# Altium PCB Clock Segment.PcbDoc
Units mm, origin at the board's own origin, x right, y up, seen from the top; angles counter-clockwise.
Board outline 100.88 x 86.34 mm, 2 copper layers (Top Layer, Bottom Layer), stack 1.58 mm thick; 43 components, 53 nets, 142 pads, 0 vias.
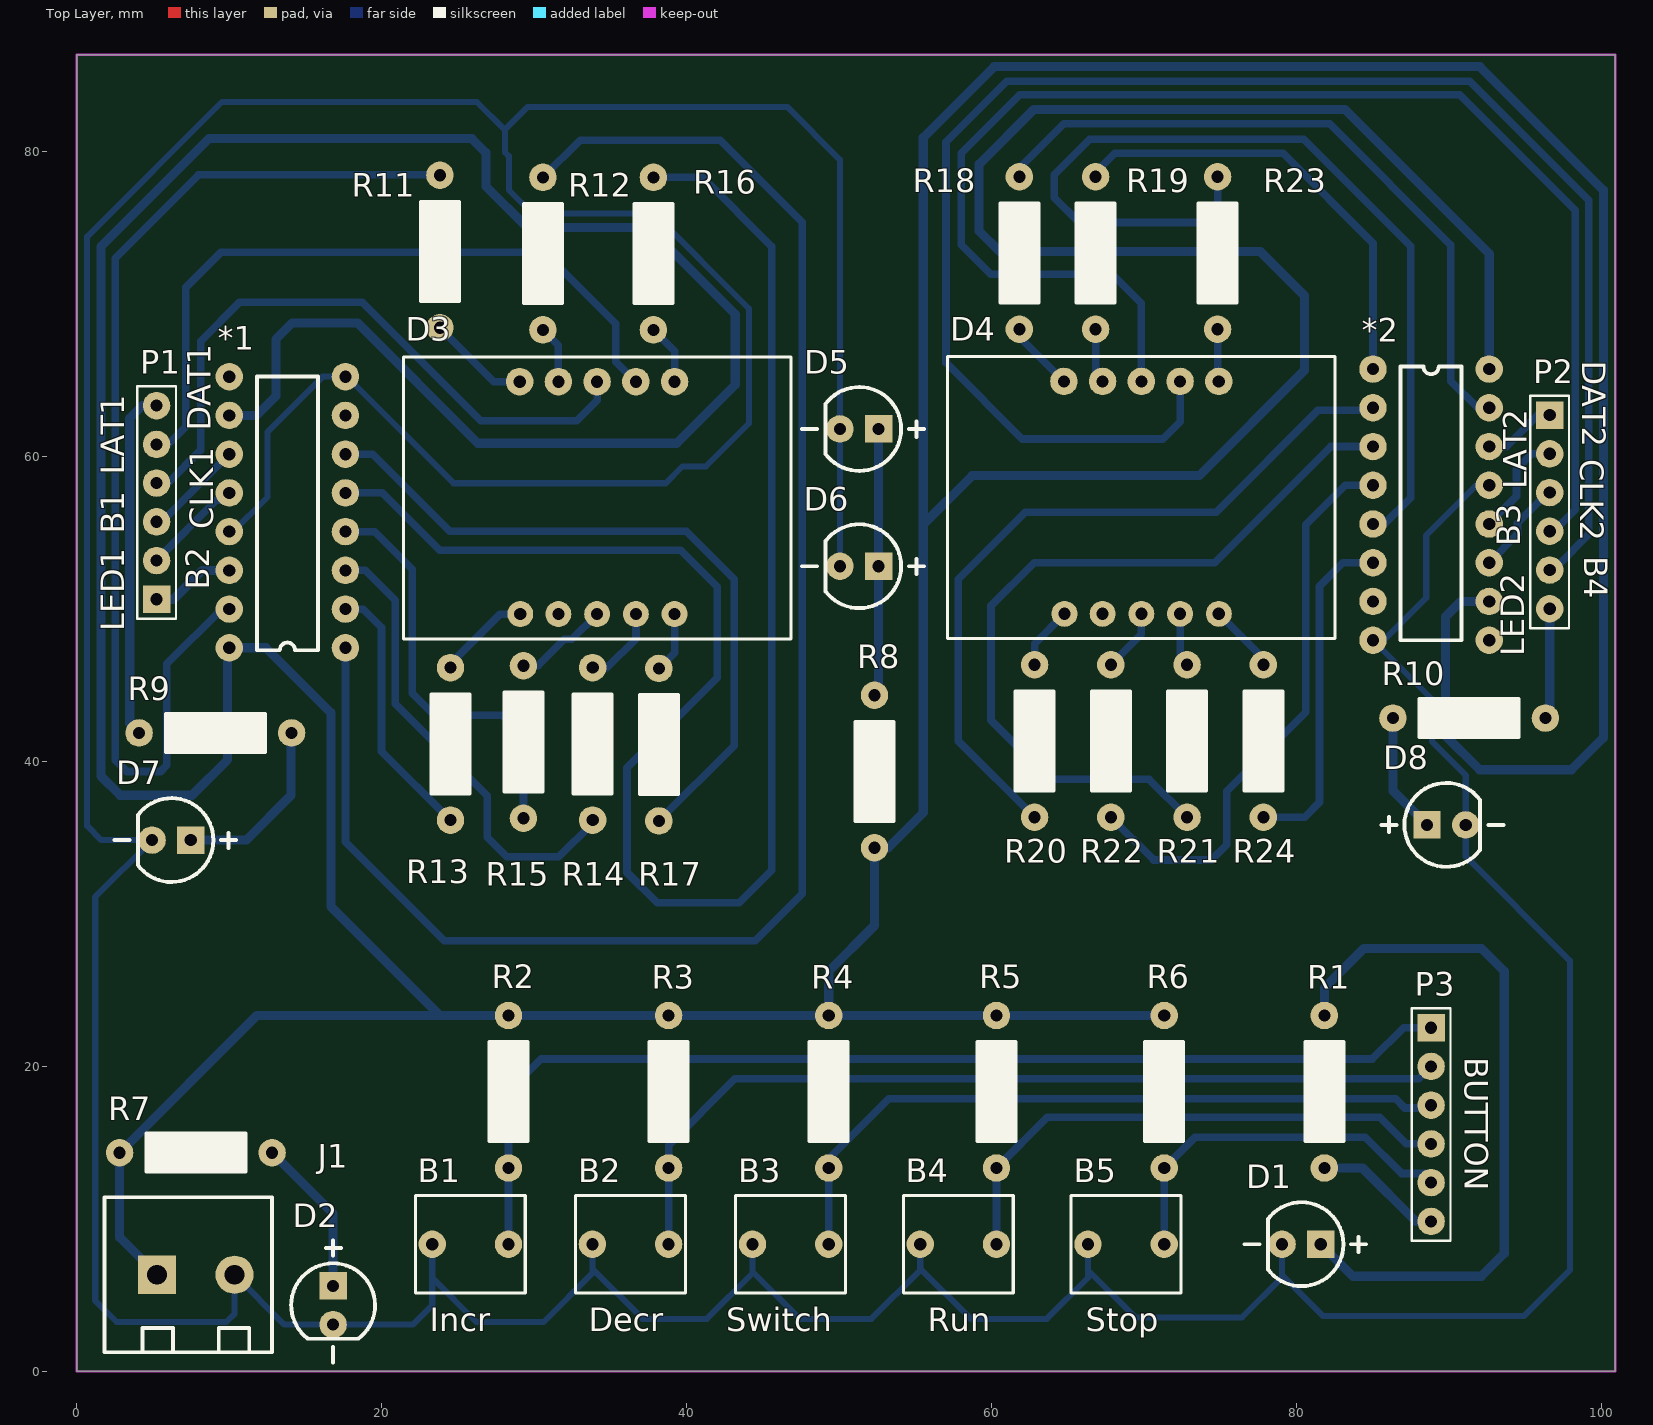
[diagram p0: Top Layer view]
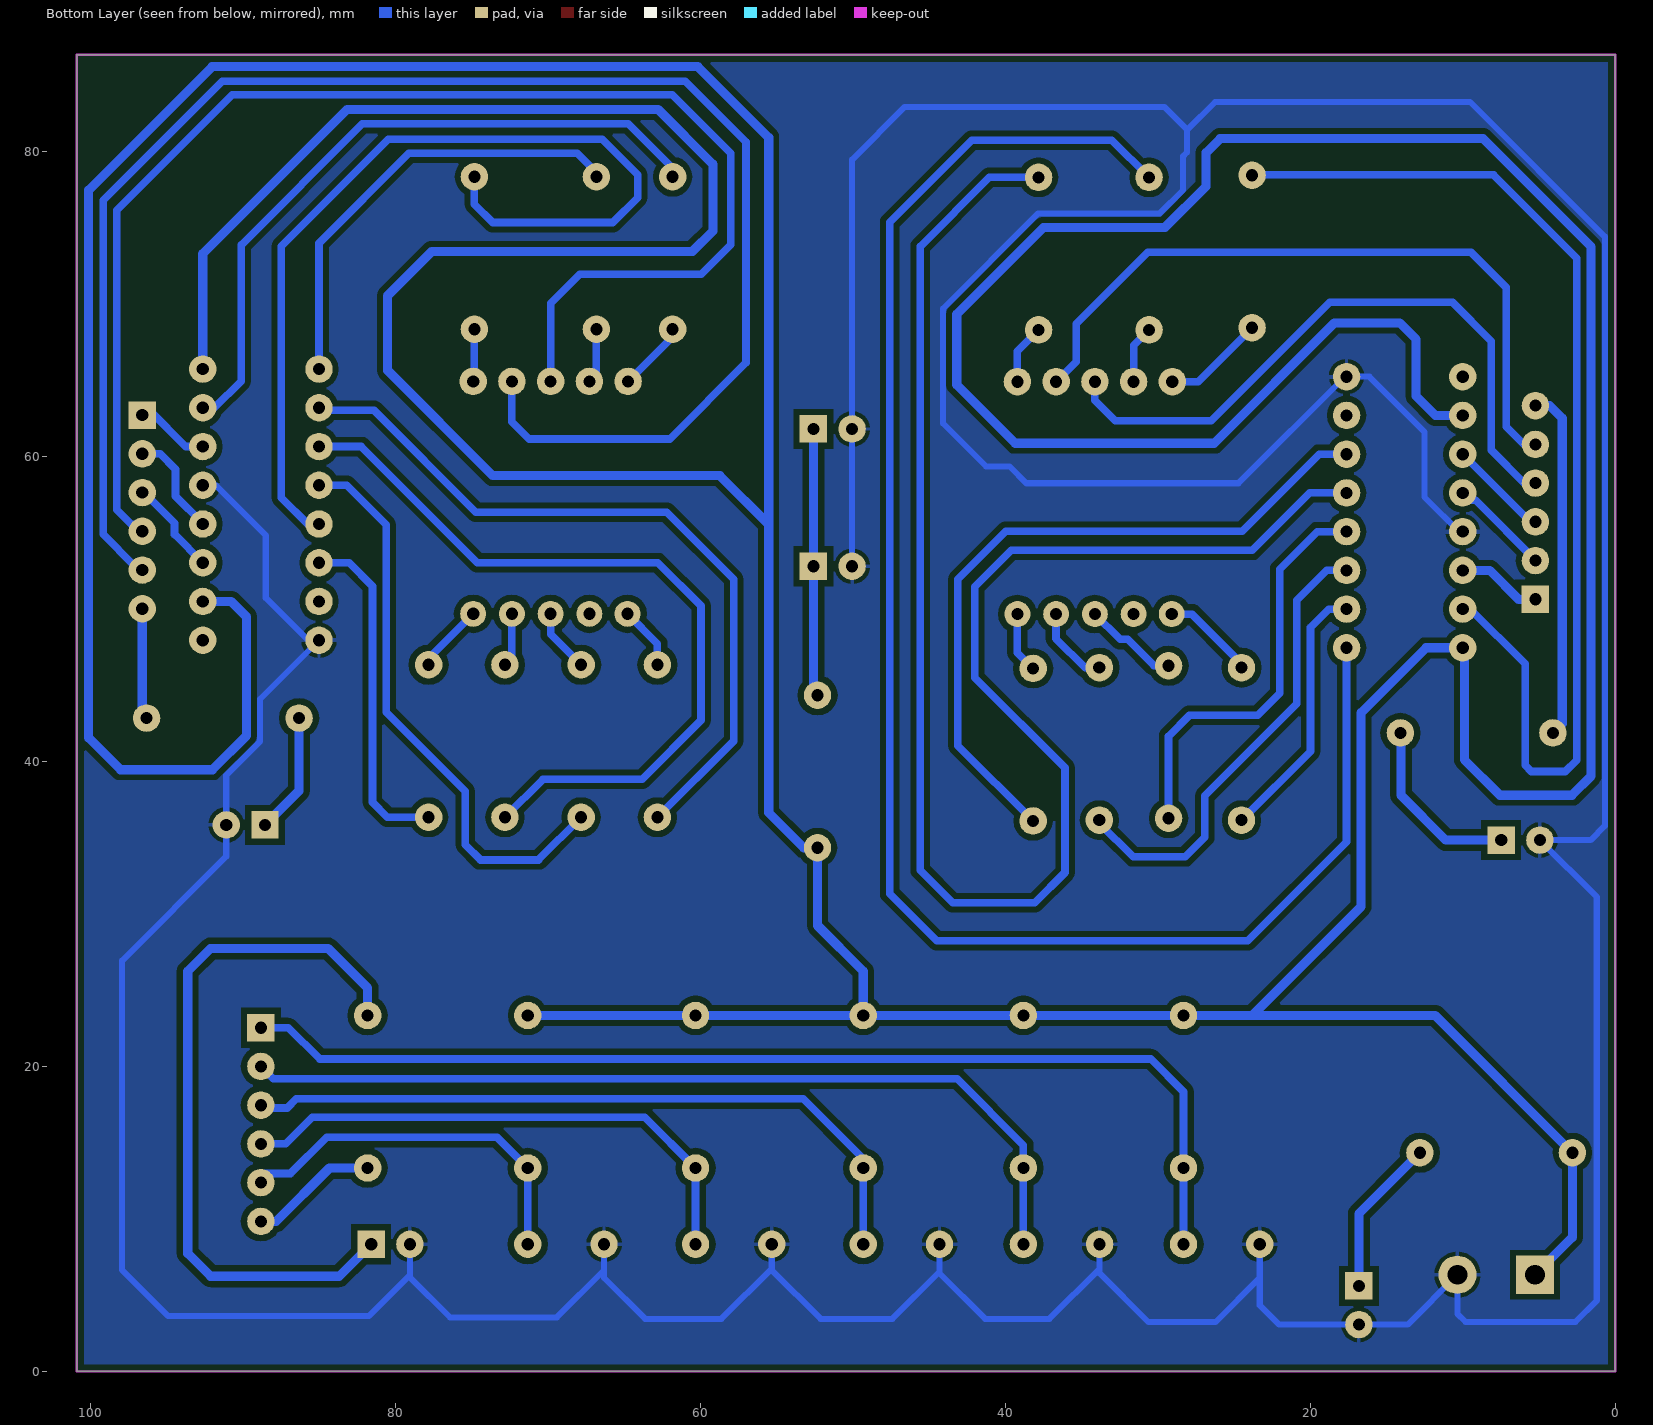
[diagram p1: Bottom Layer view, seen from below]
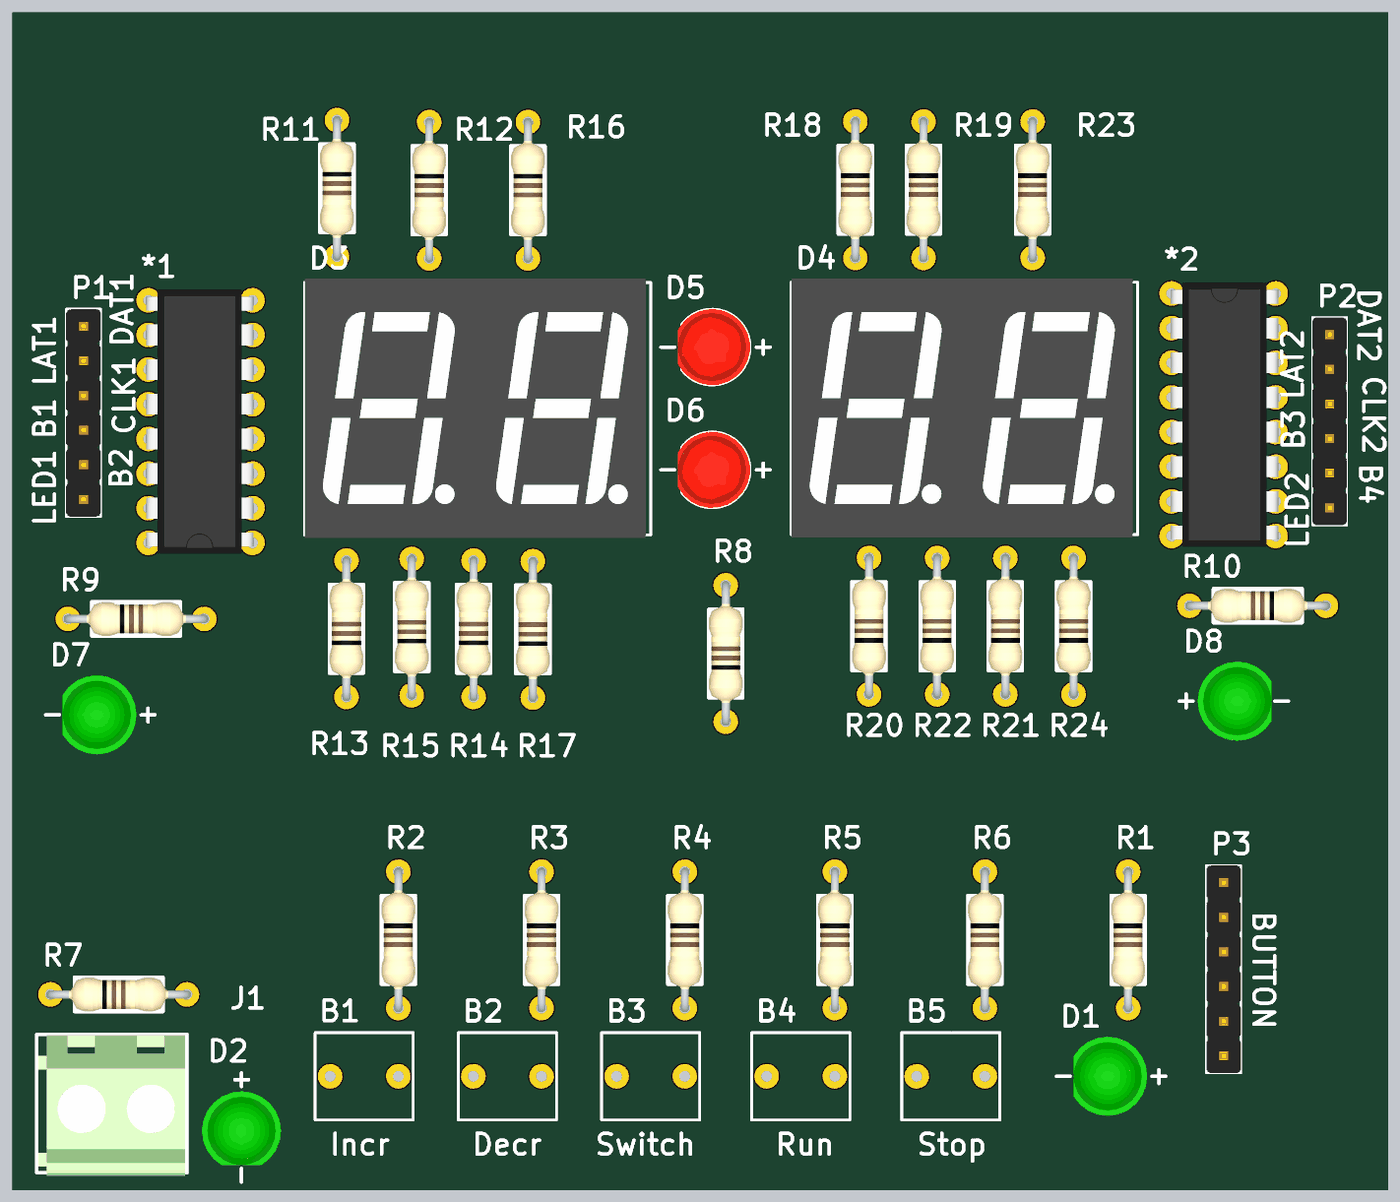
[diagram p2: 3D render of the assembled board from above, using the file's embedded part models]

## Layer stack, top to bottom
Top Solder: solder mask 0.01, Solder Resist, Dk 3.5
Top Layer: signal copper 0.035
Dielectric 1: dielectric 1.51, FR-4, Dk 4.8
Bottom Layer: signal copper 0.035
Bottom Solder: solder mask 0.01, Solder Resist, Dk 3.5

## Board outline
0,0 100.878,0 100.878,86.336 0,86.336

## Design rules (kind name [scope] priority, off if disabled: settings)
Clearance [All] p1: gap=0.4
PolygonConnect [All] p1: connectstyle=Relief reliefconductorwidth=0.254 reliefentries=4 polygonreliefangle="90 Angle" airgapwidth=0.254
RoutingVias [All] p1: holewidth=0.711 width=1.27 viastyle="Through Hole" minholewidth=0.711 minwidth=1.27 maxholewidth=0.711 maxwidth=1.27
SolderMaskExpansion [All] p1: expansion=0.102
Width [All] p1: maxlimit=0.6 minlimit=0.4 preferedwidth=0.5
30 further rules are at their usual default settings.

## Components (designator, comment, footprint, x,y, rotation, side; value= is the part's Value field where it differs from the comment)
*1 "74HC595_DIP16" DIP_16 13.807,56.34 r180 top
*2 "74HC595_DIP16" DIP_16 88.807,56.84 r0 top
B1 "Button_TH" BUTTON_TH 25.807,8.34 r0 top
B2 "Button_TH" BUTTON_TH 36.307,8.34 r0 top
B3 "Button_TH" BUTTON_TH 46.807,8.34 r0 top
B4 "Button_TH" BUTTON_TH 57.807,8.34 r0 top
B5 "Button_TH" BUTTON_TH 68.807,8.34 r0 top
D1 "LED_Green" LED_Green_TH_5mm 80.307,8.34 r180 top
D2 "LED_Green" LED_Green_TH_5mm 16.807,4.34 r270 top
D3 "7_Segment_2_Figures" 5621BS 34.119,57.283 r0 top
D4 "7_Segment_2_Figures" 5621BS 69.807,57.301 r0 top
D5 "LED_Red" LED_Red_TH_5mm 51.307,61.801 r180 top
D6 "LED_Red" LED_Red_TH_5mm 51.307,52.801 r180 top
D7 "LED_Green" LED_Green_TH_5mm 6.207,34.84 r180 top
D8 "LED_Green" LED_Green_TH_5mm 89.807,35.84 r0 top
J1 "Domino_2_Pin" domino_2_pin 7.807,6.34 r0 top
P1 "Header_1*6_Pins" HDR_M_6_Pins_2.54 5.227,63.331 r90 top
P2 "Header_1*6_Pins" HDR_M_6_Pins_2.54 96.584,50.011 r270 top
P3 "Header_1*6_Pins" HDR_M_6_Pins_2.54 88.807,9.84 r270 top
R1 "220" Resistor_TH_1/4W 81.807,18.34 r90 top
R2 "10K" Resistor_TH_1/4W 28.307,18.34 r90 top
R3 "10K" Resistor_TH_1/4W 38.807,18.34 r90 top
R4 "10K" Resistor_TH_1/4W 49.307,18.34 r90 top
R5 "10K" Resistor_TH_1/4W 60.307,18.34 r90 top
R6 "10K" Resistor_TH_1/4W 71.307,18.34 r90 top
R7 "220" Resistor_TH_1/4W 7.807,14.34 r180 top
R8 "100" Resistor_TH_1/4W 52.307,39.34 r270 top
R9 "Resistor" Resistor_TH_1/4W 9.083,41.871 r180 top
R10 "Resistor" Resistor_TH_1/4W 91.307,42.84 r0 top
R11 "220" Resistor_TH_1/4W 23.807,73.44 r90 top
R12 "220" Resistor_TH_1/4W 30.567,73.301 r90 top
R13 "220" Resistor_TH_1/4W 24.504,41.15 r270 top
R14 "220" Resistor_TH_1/4W 33.826,41.15 r270 top
R15 "220" Resistor_TH_1/4W 29.288,41.273 r270 top
R16 "220" Resistor_TH_1/4W 37.807,73.301 r90 top
R17 "220" Resistor_TH_1/4W 38.167,41.101 r270 top
R18 "220" Resistor_TH_1/4W 61.807,73.34 r90 top
R19 "220" Resistor_TH_1/4W 66.807,73.34 r90 top
R20 "220" Resistor_TH_1/4W 62.807,41.34 r270 top
R21 "220" Resistor_TH_1/4W 72.807,41.34 r270 top
R22 "220" Resistor_TH_1/4W 67.807,41.34 r270 top
R23 "220" Resistor_TH_1/4W 74.807,73.34 r90 top
R24 "220" Resistor_TH_1/4W 77.807,41.34 r270 top

## Footprints (in the part's own frame and the unit in brackets; to place one, negate y for a bottom-side part, rotate by r counter-clockwise, add the part's x,y. Pads: shape width x height; smd on the part's side, far side on the other; paste and mask are expansions set on the pad)
5621BS [mm] "0.56 inches, 10 pins"
  round 1.7 hole 0.8: 1(-5.04,-7.62) 2(-2.54,-7.62) 3(0,-7.62) 4(2.54,-7.62) 5(5.08,-7.62)
  round 1.8 hole 0.8: 6(5.08,7.62) 7(2.54,7.62) 8(0,7.62) 9(-2.54,7.62) 10(-5.08,7.62)
  silkscreen extent -12.7,-9.25 12.7,9.25, body extent -12.66,-9.46 12.34,9.54, height 8
BUTTON_TH [mm] "6x6mm, TH, 2 Pins"
  round 1.8 hole 0.8: 1(-2.5,0) 2(2.5,0)
  silkscreen extent -3.6,-3.2 3.6,3.2, body extent -3.12,-3.11 3.12,3.11, height 5.5
DIP_16 [mm] "Pitch: 2.54mm, 16 pins"
  round 1.8 hole 0.8: 1(-3.81,8.89) 2(-3.81,6.35) 3(-3.81,3.81) 4(-3.81,1.27) 5(-3.81,-1.27) 6(-3.81,-3.81) 7(-3.81,-6.35) 8(-3.81,-8.89) 9(3.81,-8.89) 10(3.81,-6.35) 11(3.81,-3.81) 12(3.81,-1.27) 13(3.81,1.27) 14(3.81,3.81) 15(3.81,6.35) 16(3.81,8.89)
  silkscreen extent -2,-8.89 2,9.05, body extent -3.87,-9.7 4,9.7, height 4.66
domino_2_pin [mm]
  rect 2.5x2.5 hole 1.3: 1(-2.54,0)
  round 2.5 hole 1.3: 2(2.54,0)
  silkscreen extent -6,-5.08 5,5.08, body extent -5.88,-5.3 4.88,5, height 14.19
HDR_M_6_Pins_2.54 [mm] "Male, distance = 2.54mm, straight"
  rect 1.8x1.8 hole 0.8: 1(-12.7,0)
  round 1.8 hole 0.8: 2(-10.16,0) 3(-7.62,0) 4(-5.08,0) 5(-2.54,0) 6(0,0)
  silkscreen extent -13.97,-1.27 1.27,1.27, body extent -13.97,-1.27 1.27,1.27, height 8.89
LED_Green_TH_5mm [mm]
  rect 1.8x1.8 hole 0.8: 1(-1.27,0)
  round 1.8 hole 0.8: 2(1.27,0)
  silkscreen extent -4.25,-2.75 3.75,2.75, body extent -2.9,-2.9 2.5,2.9, height 8.72
LED_Red_TH_5mm [mm]
  rect 1.8x1.8 hole 0.8: 1(-1.27,0)
  round 1.8 hole 0.8: 2(1.27,0)
  silkscreen extent -4.25,-2.75 3.75,2.75, body extent -2.8,-2.8 2.5,2.8, height 9.3
Resistor_TH_1/4W [mm]
  round 1.8 hole 0.8: 1(-5,0) 2(5,0)
  silkscreen extent -3.25,-1.25 3.25,1.25, body extent -5.3,-1.25 5.3,1.25, height 2.55

## Part data
B1 B2 B3 B4 B5: "6x6mm, TH, 2 Pins"
R1 R2 R3 R4 R5 R6 R7 R8 R11 R12 R13 R14 R15 R16 R17 R18 R19 R20 R21 R22 R23 R24: library part Resistor, "Resistor_TH_1/4W"
R9 R10: "Resistor_TH_1/4W"

## Nets (pads, with @x,y where several pads share a name; then routed paths per layer and width w, separated by ;. In a path a pad name is that pad's centre, name@x,y a point inside that pad or via, vN(x,y) a via of type N, cw(c..) or ccw(c..) an arc to the next point about the centre after c; other vN are vias at no path point)
B1: D3.8 P1.4 | length 43.1
  Bottom Layer w0.5: P1.4@5.131,58.06 5.322,58.251 5.954,58.251 8.124,60.421 8.124,67.557 10.667,70.1 18.721,70.1 26.481,62.34 32.776,62.34 34.119,63.683 D3.8
B2: D3.7 P1.5 | length 47
  Bottom Layer w0.5: P1.5@5.227,60.8 6.006,60.8 7.145,61.939 7.145,71.078 9.455,73.388 30.659,73.388 35.347,68.7 35.347,66.215 D3.7
B3: D4.8 P2.4 | length 91.4
  Bottom Layer w0.5: D4.8 69.807,70.04 67.904,71.943 59.942,71.943 57.99,73.895 57.99,79.879 61.822,83.711 90.677,83.711 98.253,76.135 98.253,56.509 97.305,55.561 97.054,55.561 P2.4
B4: D4.7 P2.5 | length 107.2
  Bottom Layer w0.5: D4.7 72.347,62.28 71.207,61.14 62.007,61.14 56.998,66.149 56.998,80.623 60.986,84.611 91.332,84.611 99.153,76.791 99.153,54.886 97.107,52.84 P2.5@96.807,52.84
BUTTON1: B1.2 P3.1 R2.1 | length 72.2
  Bottom Layer w0.5: B1.2 R2.1 28.307,18.34 30.456,20.489 84.956,20.489 87.007,22.54 P3.1
BUTTON2: B2.2 P3.2 R3.1 | length 58.6
  Bottom Layer w0.5: B2.2 R3.1 38.807,14.84 43.151,19.184 87.991,19.184 P3.2
BUTTON3: B3.2 P3.3 R4.1 | length 47.1
  Bottom Layer w0.5: B3.2 R4.1 49.307,13.94 53.245,17.878 86.483,17.878 87.087,17.274 88.621,17.274 P3.3
BUTTON4: B4.2 P3.4 R5.1 | length 35.6
  Bottom Layer w0.5: B4.2 R5.1 63.624,16.657 85.433,16.657 87.17,14.92 P3.4
BUTTON5: B5.2 P3.5 R6.1 | length 24.7
  Bottom Layer w0.5: B5.2 R6.1 73.324,15.357 84.49,15.357 86.867,12.98 88.507,12.98 88.807,12.68 P3.5
CLK1: *1.11 P1.3 | length 7.2
  Bottom Layer w0.5: P1.3@4.584,55.797 5.644,55.797 *1.11
CLK2: *2.11 P2.3 | length 6.3
  Bottom Layer w0.5: *2.11 94.471,54.884 94.471,55.624 P2.3@96.531,57.684
DATA1: *1.14 P1.1 | length 5.4
  Bottom Layer w0.6: P1.1@5.408,50.621 6.324,50.621 8.233,52.53 *1.14
DATA2: *2.14 P2.1 | length 5.2
  Bottom Layer w0.5: *2.14 93.723,60.65 96.113,63.04 P2.1@96.807,63.04
GND: *1.8 *1.13 *2.8 *2.13 B1.1 B2.1 B3.1 B4.1 B5.1 D1.2 D2.2 D5.2 D6.2 D7.2 D8.2 J1.2 | length 435.9
  Bottom Layer w0.4: *1.13@10.117,54.95 12.507,57.34 12.507,61.611 16.126,65.23 17.717,65.23 24.707,58.24 38.607,58.24 39.707,59.34 41.242,59.34 44.079,62.177 44.079,69.693 37.854,75.918 29.89,75.918 28.335,77.473 28.335,79.685 28.09,79.93 28.09,81.454 29.556,82.92 46.584,82.92 50.037,79.467 D5.2 D6.2 ; 28.052,81.416 26.226,83.243 9.51,83.243 0.675,74.408 0.675,35.772 1.607,34.84 D7.2 1.209,31.112 1.209,4.638 2.607,3.24 9.807,3.24 10.347,3.78 J1.2 13.617,3.07 D2.2 22.037,3.07 23.307,4.34 B1.1 23.307,6.14 26.207,3.24 30.607,3.24 33.807,6.44 B2.1 33.807,6.74 37.107,3.44 41.307,3.44 44.307,6.44 B3.1 44.307,6.54 47.407,3.44 52.107,3.44 55.307,6.64 B4.1 55.307,6.74 58.607,3.44 63.607,3.44 66.307,6.14 B5.1 66.307,6.64 69.407,3.54 76.407,3.54 79.037,6.17 D1.2 79.037,6.31 81.707,3.64 94.907,3.64 97.907,6.64 97.907,26.94 91.077,33.77 D8.2 91.077,39.096 88.854,41.319 88.854,44.093 *2.8 85.717,47.95 88.487,50.72 88.487,54.82 91.777,58.11 *2.13
LAT1: *1.12 P1.2 | length 5.9
  Bottom Layer w0.5: P1.2@5.227,53.21 9.151,57.134 *1.12@9.473,57.134
LAT2: *2.12 P2.2 | length 7.3
  Bottom Layer w0.5: *2.12 92.617,55.606 94.407,57.396 94.407,59.171 95.407,60.171 96.478,60.171 P2.2@96.807,60.5
LED1: P1.6 R9.2 | length 23
  Bottom Layer w0.6: R9.2 3.475,42.479 3.475,62.508 4.298,63.331 P1.6
LED2: P2.6 R10.2 | length 7.7
  Bottom Layer w0.6: R10.2 96.588,43.121 96.588,50.121 P2.6@96.807,50.34
LED4: P3.6 R1.1 | length 8.4
  Bottom Layer w0.6: R1.1 84.307,13.34 87.807,9.84 P3.6
Net*1_1: *1.1 R12.2 | length 110.9
  Bottom Layer w0.5: *1.1 17.617,34.73 24.107,28.24 44.484,28.24 47.579,31.335 47.579,75.347 42.186,80.74 33.006,80.74 R12.2
Net*1_2: *1.2 R13.2 | length 17.4
  Bottom Layer w0.5: *1.2 18.772,49.99 19.976,48.786 19.976,40.678 R13.2
Net*1_3: *1.3 R14.2 | length 30.7
  Bottom Layer w0.5: *1.3 18.917,52.53 20.876,50.571 20.876,43.771 26.907,37.74 26.907,35.04 28.207,33.74 31.607,33.74 33.826,35.959 R14.2
Net*1_4: *1.4 R15.2 | length 27.4
  Bottom Layer w0.5: *1.4 19.542,55.07 22.002,52.61 22.002,44.462 23.432,43.032 27.915,43.032 29.288,41.659 R15.2
Net*1_5: *1.5 R16.2 | length 109.9
  Bottom Layer w0.5: *1.5 20.037,57.61 23.807,53.84 39.602,53.84 41.993,51.449 41.993,45.494 36.077,39.578 36.077,32.717 38.062,30.732 43.435,30.732 45.582,32.879 45.582,73.765 41.046,78.301 R16.2
Net*1_6: *1.6 R17.2 | length 46.8
  Bottom Layer w0.5: *1.6 19.401,60.15 24.458,55.093 39.954,55.093 43.107,51.94 43.107,41.041 R17.2
Net*1_15: *1.15 R11.2 | length 72.7
  Bottom Layer w0.5: *1.15 9.493,49.99 5.907,46.404 5.907,39.74 5.507,39.34 3.271,39.34 2.525,40.086 2.525,73.006 7.982,78.463 23.547,78.463 R11.2@23.807,78.203
Net*2_1: *2.1 R19.2 | length 29.7
  Bottom Layer w0.5: R19.2 66.807,78.64 68.057,79.89 79.099,79.89 84.997,73.992 *2.1
Net*2_2: *2.2 R20.2 | length 49.5
  Bottom Layer w0.5: R20.2 57.807,41.34 57.807,51.94 62.207,56.34 74.707,56.34 81.391,63.024 84.831,63.024 *2.2
Net*2_3: *2.3 R21.2 | length 52.4
  Bottom Layer w0.5: R21.2 70.307,38.84 63.807,38.84 59.947,42.7 59.947,50.202 62.785,53.04 74.607,53.04 82.217,60.65 *2.3
Net*2_4: *2.4 R22.2 | length 37.8
  Bottom Layer w0.5: R22.2 70.607,33.54 74.407,33.54 75.407,34.54 75.407,38.04 80.589,43.222 80.589,55.522 83.177,58.11 *2.4
Net*2_5: *2.5 R23.2 | length 62.1
  Bottom Layer w0.5: R23.2 74.807,76.54 73.607,75.34 65.73,75.34 64.107,76.963 64.107,78.462 66.435,80.79 80.453,80.79 87.461,73.782 87.461,57.294 85.737,55.57 *2.5
Net*2_6: *2.6 R24.2 | length 22.4
  Bottom Layer w0.5: R24.2 80.507,36.34 81.489,37.322 81.489,51.496 83.023,53.03 *2.6
Net*2_15: *2.15 R18.2 | length 45.5
  Bottom Layer w0.5: R18.2 61.807,78.894 64.724,81.811 82.158,81.811 90.107,73.862 90.107,64.94 91.857,63.19 *2.15
NetD1_1: D1.1 R1.2 | length 47.3
  Bottom Layer w0.6: D1.1 83.677,6.24 92.107,6.24 93.607,7.74 93.607,26.24 92.107,27.74 84.407,27.74 81.807,25.14 R1.2
NetD2_1: D2.1 R7.1 | length 10.4
  Bottom Layer w0.6: R7.1 16.807,10.34 D2.1
NetD3_1: D3.1 R13.1 | length 6.2
  Bottom Layer w0.5: R13.1 24.504,46.418 27.749,49.663 D3.1
NetD3_3: D3.3 R15.1 | length 6.2
  Bottom Layer w0.5: R15.1 30.24,46.273 31.967,48 32.456,48 D3.3
NetD3_4: D3.4 R14.1 | length 5.2
  Bottom Layer w0.5: R14.1 34.762,46.15 36.672,48.06 D3.4@36.672,49.663
NetD3_5: D3.5 R17.1 | length 4
  Bottom Layer w0.5: R17.1 39.202,47.136 D3.5@39.202,49.663
NetD3_6: D3.6 R16.1 | length 4
  Bottom Layer w0.5: R16.1 39.199,66.909 D3.6
NetD3_9: D3.9 R12.1 | length 3.8
  Bottom Layer w0.5: R12.1 31.579,67.289 D3.9
NetD3_10: D3.10 R11.1 | length 6.7
  Bottom Layer w0.5: R11.1@23.801,68.434 27.332,64.903 D3.10
NetD4_1: D4.1 R20.1 | length 4.2
  Bottom Layer w0.5: R20.1 62.807,47.721 D4.1
NetD4_3: D4.3 R22.1 | length 4.2
  Bottom Layer w0.5: R22.1 69.807,48.34 D4.3
NetD4_4: D4.4 R21.1 | length 3.5
  Bottom Layer w0.5: D4.4 72.347,46.8 R21.1
NetD4_5: D4.5 R24.1 | length 4.6
  Bottom Layer w0.5: D4.5 77.807,46.761 R24.1
NetD4_6: D4.6 R23.1 | length 3.5
  Bottom Layer w0.5: R23.1 74.807,65.001 D4.6
NetD4_9: D4.9 R19.1 | length 3.6
  Bottom Layer w0.5: R19.1 66.807,65.381 D4.9
NetD4_10: D4.10 R18.1 | length 4.6
  Bottom Layer w0.5: R18.1 61.807,67.841 D4.10
NetD5_1: D5.1 D6.1 R8.1 | length 17.6
  Bottom Layer w0.6: R8.1 52.577,44.61 D6.1 D5.1
NetD7_1: D7.1 R9.1 | length 11.9
  Bottom Layer w0.6: D7.1 11.107,34.84 14.045,37.778 R9.1@14.045,41.871
NetD8_1: D8.1 R10.1 | length 7.9
  Bottom Layer w0.6: R10.1 86.307,38.07 D8.1
VO: *1.10 *1.16 *2.10 *2.16 J1.1 R2.2 R3.2 R4.2 R5.2 R6.2 R7.2 R8.2 | length 544.5
  Bottom Layer w0.6: J1.1 2.807,8.8 R7.2 11.807,23.34 R2.2 ; *1.10 11.787,62.69 13.052,63.955 13.052,67.676 14.136,68.76 18.403,68.76 26.296,60.867 39.344,60.867 43.179,64.702 43.179,69.32 37.481,75.018 29.517,75.018 26.824,77.711 26.824,79.923 25.907,80.84 8.662,80.84 1.575,73.753 1.575,39.048 2.838,37.785 7.552,37.785 9.889,40.122 9.889,47.342 *1.16 12.397,47.45 16.659,43.188 16.659,30.488 23.807,23.34 R2.2 ; 55.507,55.54 58.707,58.74 73.607,58.74 80.507,65.64 80.507,70.54 77.607,73.44 60.51,73.44 59.172,74.778 59.172,79.164 62.769,82.761 83.145,82.761 92.617,73.289 *2.16 ; R6.2 R5.2 R4.2 ; *2.10 90.757,50.49 89.754,49.487 89.754,41.692 91.989,39.457 98.01,39.457 100.103,41.55 100.103,77.467 92.009,85.561 60.161,85.561 55.507,80.907 55.507,36.64 53.207,34.34 R8.2 52.307,29.24 49.307,26.24 R4.2 ; R2.2 R3.2 R4.2
pads on no net: *1.7 *1.9 *2.7 *2.9 D3.2 D4.2

## Polygon pours and split planes (outlines as drawn)
GND on Bottom Layer "Bottom Layer-No Net" (solid, remove dead copper, pour order 0): 0,0 100.878,0 100.878,86.336 0,86.336

## Keep-outs
Keep-Out Layer:
  the board outline again, w0.15

## Silkscreen, mask and mechanical layers (free items; w line width, h text height)
Top Overlay:
  text "DAT2" at 98.72,66.27 h1.52 r270
  text "DAT1" at 8.78,61.68 h1.52 r90
  text "CLK2" at 98.596,59.814 h1.52 r270
  text "LAT1" at 3.11,58.8 h1.52 r90
  text "LAT2" at 95.064,57.846 h1.52 r90
  text "CLK1" at 8.93,55.23 h1.52 r90
  text "B1" at 3.11,54.92 h1.52 r90
  text "B3" at 94.64,54.11 h1.52 r90
  text "B4" at 98.84,53.44 h1.52 r270
  text "B2" at 8.7,51.26 h1.52 r90
  text "LED1" at 3.11,48.54 h1.52 r90
  text "LED2" at 94.93,46.91 h1.52 r90
  text "BUTTON" at 91.01,20.61 h1.52 r270
  text "Incr" at 23.135,2.624 h1.52
  text "Decr" at 33.559,2.624 h1.52
  text "Switch" at 42.583,2.624 h1.52
  text "Run" at 55.803,2.624 h1.52
  text "Stop" at 66.168,2.624 h1.52